# Altium PCB audioVersterkerPCB.PcbDoc
Units mil, origin at the board's own origin, x right, y up, seen from the top; angles counter-clockwise.
Board outline 6000 x 4000 mil, 2 copper layers (Top Layer, Bottom Layer); 63 components, 33 nets, 144 pads, 3 vias.
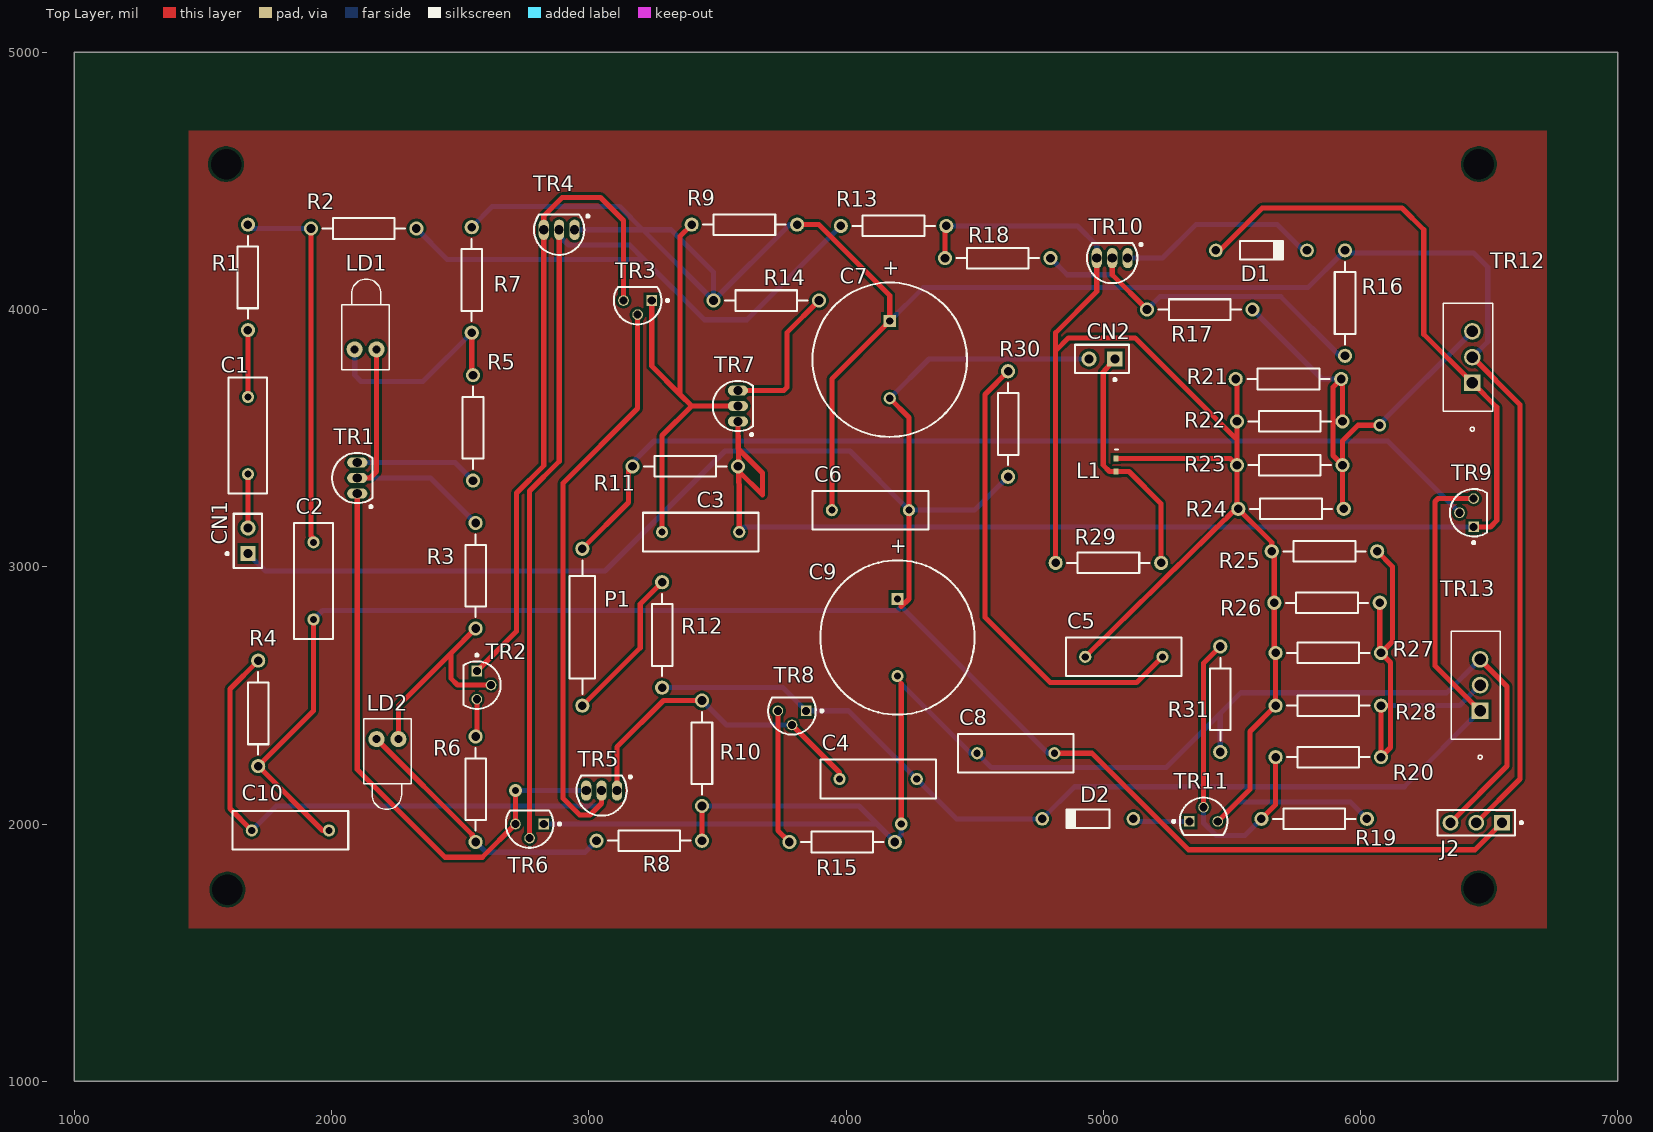
[diagram p0: Top Layer view]
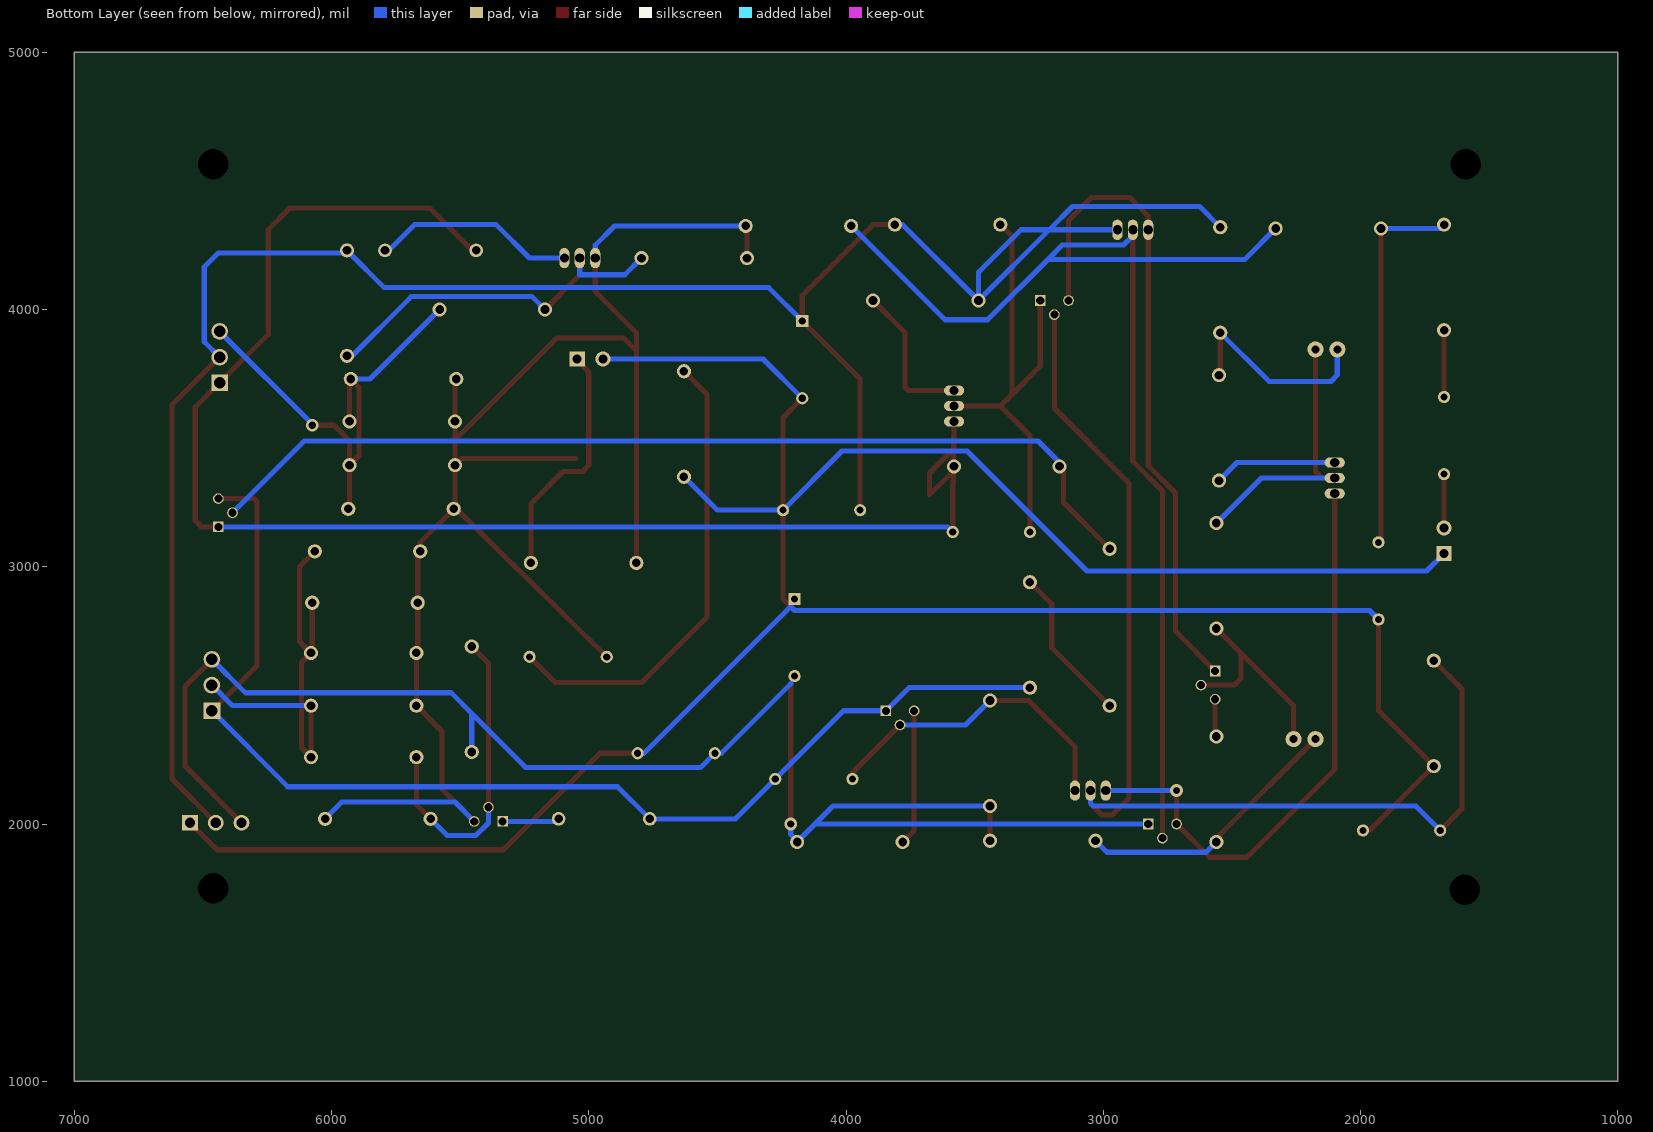
[diagram p1: Bottom Layer view, seen from below]

## Layer stack, top to bottom
Top Solder: solder mask 0.4, Solder Resist, Dk 3.5
Top Layer: signal copper 1.4
Dielectric 1: dielectric 12.6, FR-4, Dk 4.8
Bottom Layer: signal copper 1.4
Bottom Solder: solder mask 0.4, Solder Resist, Dk 3.5

## Board outline
1000,1000 7000,1000 7000,5000 1000,5000

## Design rules (kind name [scope] priority, off if disabled: settings)
Clearance [All] p1: gap=10 ignorepadtopadclearanceinfootprint=FALSE except(0: Arc-Hole Track-Hole SMDPad-Hole THPad-Hole Via-Hole Fill-Hole Poly-Hole Region-Hole Text-Hole)
HoleSize [All] p1: absolutevalues=TRUE maxlimit=137.8 minlimit=1 maxpercent=80.000 minpercent=20.000
PolygonConnect [All] p1: connectstyle=Relief reliefconductorwidth=10 reliefentries=4 polygonreliefangle="90 Angle" airgapwidth=10
RoutingVias [All] p1: holewidth=28 width=50 viastyle="Through Hole" minholewidth=28 minwidth=50 maxholewidth=28 maxwidth=50
SolderMaskExpansion [All] p1: expansion=4 istentingtop=FALSE
Width [All] p1: maxlimit=20 minlimit=20 preferedwidth=20 minimp=50.000000 maximp=50.000000 favimp=50.000000
29 further rules are at their usual default settings.

## Components (designator, comment, footprint, x,y, rotation, side; value= is the part's Value field where it differs from the comment)
C1 "Cap" RAD-0.3 1675,3510 r90 top value=100pF
C2 "Cap" RAD-0.3 1930,2945 r270 top value=100pF
C3 "Cap" RAD-0.3 3435,3135 r0 top value=100pF
C4 "Cap" RAD-0.3 4125,2175 r180 top value=100pF
C5 "Cap" RAD-0.3 5080,2650 r0 top value=100pF
C6 "Cap" RAD-0.3 4095,3220 r0 top value=100pF
C7 "Cap Pol1" RB7.6-15 4170,3805 r90 top value=100pF
C8 "Cap" RAD-0.3 4660,2275 r180 top value=100pF
C9 "Cap Pol1" RB7.6-15 4200,2725 r90 top value=100pF
C10 "Cap" RAD-0.3 1840,1975 r0 top value=100pF
CN1 "MHDR1X2" PIN2 1675,3051 r90 top
CN2 "MHDR1X2" PIN2 5045,3808 r180 top
D1 "1N4148" NXP-SOD27-2_V 5615,4230 r0 top
D2 "1N4148" NXP-SOD27-2_V 4940,2020 r180 top
J2 "22-28-4033" MOLX-22-28-4033_V 6450,2005 r180 top
L1 "Inductor" 0402-A 5050,3395.32 r270 top value=10mH
LD1 "LED1" LED-1 2135,3845 r90 top
LD2 "LED1" LED-1 2215,2330 r270 top
P1 "Res Adj2" AXIAL-0.6 2975,2765 r90 top value=1K
R1 "Res2" AXIAL-0.4 1675,4125 r90 top value=1K
R2 "Res2" AXIAL-0.4 2125,4315 r0 top value=1K
R3 "Res2" AXIAL-0.4 2560,2965 r90 top value=1K
R4 "Res2" AXIAL-0.4 1715,2430 r90 top value=1K
R5 "Res2" AXIAL-0.4 2550,3540 r90 top value=1K
R6 "Res2" AXIAL-0.4 2560,2135 r90 top value=1K
R7 "Res2" AXIAL-0.4 2545,4115 r90 top value=1K
R8 "Res2" AXIAL-0.4 3235,1935 r0 top value=1K
R9 "Res2" AXIAL-0.4 3605,4330 r0 top value=1K
R10 "Res2" AXIAL-0.4 3440,2275 r90 top value=1K
R11 "Res2" AXIAL-0.4 3375,3390 r0 top value=1K
R12 "Res2" AXIAL-0.4 3285,2735 r90 top value=1K
R13 "Res2" AXIAL-0.4 4185,4325 r0 top value=1K
R14 "Res2" AXIAL-0.4 3690,4035 r180 top value=1K
R15 "Res2" AXIAL-0.4 3985,1930 r180 top value=1K
R16 "Res2" AXIAL-0.4 5940,4025 r90 top value=1K
R17 "Res2" AXIAL-0.4 5375,4000 r0 top value=1K
R18 "Res2" AXIAL-0.4 4590,4200 r0 top value=1K
R19 "Res2" AXIAL-0.4 5820,2020 r0 top value=1K
R20 "Res2" AXIAL-0.4 5875,2260 r0 top value=1K
R21 "Res2" AXIAL-0.4 5720,3730 r0 top value=1K
R22 "Res2" AXIAL-0.4 5725,3565 r0 top value=1K
R23 "Res2" AXIAL-0.4 5725,3395 r0 top value=1K
R24 "Res2" AXIAL-0.4 5730,3225 r0 top value=1K
R25 "Res2" AXIAL-0.4 5860,3060 r180 top value=1K
R26 "Res2" AXIAL-0.4 5870,2860 r180 top value=1K
R27 "Res2" AXIAL-0.4 5875,2665 r180 top value=1K
R28 "Res2" AXIAL-0.4 5875,2460 r180 top value=1K
R29 "Res2" AXIAL-0.4 5020,3015 r0 top value=1K
R30 "Res2" AXIAL-0.4 4630,3555 r90 top value=1K
R31 "Res2" AXIAL-0.4 5455,2485 r90 top value=1K
TR1 "BC560CG" TO-92A 2100,3345 r0 top
TR2 "BC550CG" ONSC-TO-92-3-29-11 2565,2540 r270 top
TR3 "BC550CG" ONSC-TO-92-3-29-11 3190,4035 r180 top
TR4 "BC550CG" TO-92A 2885,4310 r90 top
TR5 "BC560CG" TO-92A 3050,2130 r90 top
TR6 "BC560CG" ONSC-TO-92-3-29-11 2770,2000 r180 top
TR7 "BC560CG" TO-92A 3580,3625 r0 top
TR8 "BC550CG" ONSC-TO-92-3-29-11 3790,2440 r180 top
TR9 "BC550CG" ONSC-TO-92-3-29-11 6440,3210 r90 top
TR10 "BC550CG" TO-92A 5035,4200 r90 top
TR11 "BC560CG" ONSC-TO-92-3-29-11 5390,2010 r0 top
TR12 "BDW93C" BDW93C 2840,17160 r90 top
TR13 "BDW94C" BDW94C 4860,9480 r90 top

## Footprints (in the part's own frame and the unit in brackets; to place one, negate y for a bottom-side part, rotate by r counter-clockwise, add the part's x,y. Pads: shape width x height; smd on the part's side, far side on the other; paste and mask are expansions set on the pad)
0402-A [mm] "Chip Inductor, Body 1.0x0.5mm, IPC High Density"
  rect 0.6x0.5 smd: 1(-0.635,0) 2(0.635,0)
  silkscreen extent -1.52,-0.13 -1.52,0.17, body extent -0.55,-0.3 0.55,0.3, height 0.55
AXIAL-0.4 [mm] "Axial Device, Thru-Hole; 2 Leads; 0.4 in Pin Spacing"
  round 1.4 hole 0.85: 1(-5.207,0) 2(5.207,0)
  silkscreen extent -4.06,-1.02 4.06,1.02
AXIAL-0.6 [mm] "Axial Device, Thru-Hole; 2 Leads; 0.6 in Pin Spacing"
  round 1.4 hole 0.85: 1(-7.747,0) 2(7.747,0)
  silkscreen extent -6.6,-1.27 6.6,1.27
BDW93C [mil]
  rect 65x65 hole 45: 1(-13445,-3595)
  round 65 hole 45: 2(-13345,-3595) 3(-13245,-3595)
  silkscreen extent -13633,-3674 -13135,-3483, body extent -13445,-3595 -13435,-3585, height 10
BDW94C [mil]
  rect 65x65 hole 45: 1(-7040,-1605)
  round 65 hole 45: 2(-6940,-1605) 3(-6840,-1605)
  silkscreen extent -7228,-1684 -6730,-1493, body extent -7040,-1605 -7030,-1595, height 10
LED-1 [mm] "LED; 2 Leads"
  round 1.6 hole 0.8: 1(0,1.143) 2(0,-1.016)
  silkscreen extent -2,-2.29 6.95,2.41
MOLX-22-28-4033_V [mm] "THD, 3-Leads, Body 7.62x2.49mm, Pitch 2.54mm"
  rect 1.55x1.55 hole 1.02: 1(-2.54,0)
  round 1.55 hole 1.02: 2(0,0) 3(2.54,0)
  silkscreen extent -4.59,-1.25 3.81,1.25, body extent -3.81,-1.24 3.81,1.24, height 8.38
NXP-SOD27-2_V [mm] "SOD27, 2-Leads, Dia 1.85mm, Body Length 4.25mm, Pin Spacing 9mm"
  round 1.35 hole 0.85: 1(-4.5,0) 2(4.5,0)
  silkscreen extent -2.13,-0.93 2.13,0.93, body extent -4.78,-0.92 4.78,0.92, height 1.84
ONSC-TO-92-3-29-11 [mm] "TO, 3-Leads, Body Dia 4.7mm, Pitch 1.27mm"
  rect 1.05x1.05 hole 0.8: 1(-1.397,0)
  round 1.05 hole 0.8: 2(0,1.397) 3(1.397,0)
  silkscreen extent -3.07,-1.34 2.35,2.35, body extent -2.35,-1.33 2.36,2.36, height 7.87
PIN2 [mm] "Photosensitive Diode; 2 Leads"
  rect 1.5x1.5 hole 0.9: 1(0,0)
  round 1.5 hole 0.9: 2(2.54,0)
  silkscreen extent -1.4,-1.4 3.94,2.17
RAD-0.3 [mm] "Radial Cap, Thru-Hole; 2 Leads; 0.3 in Pin Spacing"
  round 1.2 hole 0.7: 1(-3.81,0) 2(3.81,0)
  silkscreen extent -5.71,-1.91 5.71,1.91
RB7.6-15 [mm] "Polarized Capacitor (Radial); 2 Leads"
  rect 1.2x1.2 hole 0.7: 1(3.81,0)
  round 1.2 hole 0.7: 2(-3.81,0)
  silkscreen extent -7.62,-7.62 7.62,7.62
TO-92A [mm] "TO, Flat Index; 3 In-Line, Axial Leads; Body Dia. 4.5mm; Leads 0.51 x 0.48 mm (max)"
  oval 2x1 hole 0.9: 1(0,-1.524) 2(0,0) 3(0,1.524)
  silkscreen extent -2.48,-2.95 1.5,2.48, body extent -2.48,-2.5 1.5,2.5, height 6.86

## Part data
C1 C2 C3 C4 C5 C6 C8 C10: "Capacitor", LatestRevisionDate=17-Jul-2002, LatestRevisionNote="Re-released for DXP Platform.", PackageDescription="Radial Cap, Thru-Hole; 2 Leads; 0.3 in Pin Spacing", PackageReference=RAD-0.3, Published=8-Jun-2000, Publisher="Altium Limited"
C7 C9: "Polarized Capacitor (Radial)", LatestRevisionDate=17-Jul-2002, LatestRevisionNote="Re-released for DXP Platform.", PackageDescription="Polarized Capacitor (Radial); 2 Leads", PackageReference=RB7.6-15, Published=8-Jun-2000, Publisher="Altium Limited"
CN1 CN2: "Header, 2-Pin", LatestRevisionDate=17-Jul-2002, LatestRevisionNote="Re-released for DXP Platform.", Publisher="Altium Limited"
D1 D2: library part CMP-0648-00002-1, "High-speed Diode, 100 V, 450 mA, 2-Pin SOD27, RoHS", Manufacturer="NXP Semiconductors", Cd="4 pF Max.", ComponentLink1Description="Manufacturer URL", ComponentLink1URL=http://www.nxp.com/, ComponentLink2Description=Datasheet, ComponentLink2URL=http://www.nxp.com/documents/data_sheet/1N4148_1N4448.pdf, ComponentLink3Description="Package Specification", ComponentLink3URL=http://www.nxp.com/documents/data_sheet/1N4148_1N4448.pdf, Configuration=Single, DatasheetVersion=Aug-04, IF="200 mA Max.", IFRM="450 mA", IFSM="4 A Max.", IR (VR="20 V)=25 nA", Mounting Technology="Through Hole", PackageDescription="2-Pin Hermetically Sealed Glass Package, Axial Leaded, Dia 1.85 mm, Body Length 4.25 mm, Lead Spread 25.4 mm", PackageReference=SOD27, PackageVersion=Aug-04, PartNumber=1N4148, RoHS=TRUE, Trr="4 ns Max.", VF (IF="10 mA)=1 V", VR="100 V Max."
J2: library part CMP-1676-00001-5, "Male Header, Pitch 2.54 mm, 1 x 3 Position, Height 8.38 mm, Tail Length 3.18 mm, RoHS, Bulk", Colour=Black, Current Rating="4 A", Manufacturer=Molex, Max Operating Temperature="75 degC", Min Operating Temperature="0 degC", Package Quantity=1, Voltage Rating="250 V", ComponentLink1Description="Manufacturer URL", ComponentLink1URL=http://www.molex.com/, ComponentLink2Description=Datasheet, ComponentLink2URL=http://www.molex.com/pdm_docs/sd/022284033_sd.pdf, Contact Finish=Gold, Contact Material=Brass, Contact Plating=Gold, DatasheetVersion="Rev. G, 01/2012", Height="8.38 mm", Lead Pitch="0.1 inch", Length="7.62 mm", Mount="Through Hole", Mounting Technology="Through Hole", PackageDescription="Male Header, Pitch 2.54 mm, 1 x 3 Position, Height 8.38 mm, Tail Length 3.18 mm", PackageReference=22-28-4033, Packaging=Bulk, Pins=3, REACH SVHC=Unknown, RoHSCompliant=true, Rows=1
LD1 LD2: "Typical RED GaAs LED", LatestRevisionDate=08-Jul-2005, LatestRevisionNote="Mech Layer 1 removed.", PackageDescription="LED; 2 Leads", PackageReference=LED-1, Published=8-Jun-2000, Publisher="Altium Limited"
P1: "Variable Resistor", LatestRevisionDate=17-Jul-2002, LatestRevisionNote="Re-released for DXP Platform.", PackageDescription="Axial Device, Thru-Hole; 2 Leads; 0.6 in Pin Spacing", PackageReference=AXIAL-0.6, Published=8-Jun-2000, Publisher="Altium Limited", Set Position=0.5
R1 R2 R3 R4 R5 R6 R7 R8 R9 R10 R11 R12 R13 R14 R15 R16 R17 R18 R19 R20 R21 R22 R23 R24 R25 R26 R27 R28 R29 R30 R31: "Resistor", LatestRevisionDate=17-Jul-2002, LatestRevisionNote="Re-released for DXP Platform.", PackageDescription="Axial Device, Thru-Hole; 2 Leads; 0.4 in Pin Spacing", PackageReference=AXIAL-0.4, Published=8-Jun-2000, Publisher="Altium Limited"
TR1 TR5 TR7: library part CMP-1048-01446-1_1, "Low Noise Transistor, PNP Silicon, 3-Pin TO-92, Pb-Free, Bulk Box", Manufacturer="ON Semiconductor", ComponentLink1Description="Manufacturer URL", ComponentLink1URL=http://www.onsemi.com/, ComponentLink2Description=Datasheet, ComponentLink2URL=http://www.onsemi.com/pub_link/Collateral/BC560C-D.PDF, ComponentLink3Description="Package Specification", ComponentLink3URL=http://www.onsemi.cn/pub_link/Collateral/2N6426-D.PDF, DatasheetVersion="Rev. 4", IC Continuous (A)=-0.1, Manufacturer Part Number=BC560CG, Mounting Technology="Through Hole", PackageDescription="3-Pin Transistor Outline, Body 4.825 x 3.685 mm, Pitch 1.27 mm", PackageReference=TO-92-3-29-11_AM_SL, PackageVersion="Rev. AM", Packing="Bulk Box", PartNumber=BC560CG, Polarity=PNP, RoHS=TRUE
TR2 TR3 TR8 TR9: library part CMP-1048-01461-1, "Low Noise Transistor, NPN Silicon, 3-Pin TO-92, Pb-Free, Bulk Box", Manufacturer="On Semiconductor", ComponentLink1Description="Manufacturer URL", ComponentLink1URL=http://www.onsemi.com/, ComponentLink2Description=Datasheet, ComponentLink2URL=http://www.onsemi.com/pub_link/Collateral/BC550C-D.PDF, ComponentLink3Description="Package Specification", ComponentLink3URL=http://www.onsemi.cn/pub_link/Collateral/2N6426-D.PDF, DatasheetVersion="Rev. 2", IC Continuous (A)=0.1, Mounting Technology="Through Hole", PackageDescription="3-Pin Transistor Outline, Body 4.825 x 3.685 mm, Pitch 1.27 mm", PackageReference=TO-92-3-29-11_AM_SL, PackageVersion="Rev. AM", Packing="Bulk Box", PartNumber=BC550CG, Polarity=NPN, RoHS=TRUE
TR4 TR10: library part CMP-1048-01461-1_1, "Low Noise Transistor, NPN Silicon, 3-Pin TO-92, Pb-Free, Bulk Box", Manufacturer="ON Semiconductor", ComponentLink1Description="Manufacturer URL", ComponentLink1URL=http://www.onsemi.com/, ComponentLink2Description=Datasheet, ComponentLink2URL=http://www.onsemi.com/pub_link/Collateral/BC550C-D.PDF, ComponentLink3Description="Package Specification", ComponentLink3URL=http://www.onsemi.cn/pub_link/Collateral/2N6426-D.PDF, DatasheetVersion="Rev. 2", IC Continuous (A)=0.1, Manufacturer Part Number=BC550CG, Mounting Technology="Through Hole", PackageDescription="3-Pin Transistor Outline, Body 4.825 x 3.685 mm, Pitch 1.27 mm", PackageReference=TO-92-3-29-11_AM_SL, PackageVersion="Rev. AM", Packing="Bulk Box", PartNumber=BC550CG, Polarity=NPN, RoHS=TRUE
TR6 TR11: library part CMP-1048-01446-1, "Low Noise Transistor, PNP Silicon, 3-Pin TO-92, Pb-Free, Bulk Box", Manufacturer="On Semiconductor", ComponentLink1Description="Manufacturer URL", ComponentLink1URL=http://www.onsemi.com/, ComponentLink2Description=Datasheet, ComponentLink2URL=http://www.onsemi.com/pub_link/Collateral/BC560C-D.PDF, ComponentLink3Description="Package Specification", ComponentLink3URL=http://www.onsemi.cn/pub_link/Collateral/2N6426-D.PDF, DatasheetVersion="Rev. 4", IC Continuous (A)=-0.1, Mounting Technology="Through Hole", PackageDescription="3-Pin Transistor Outline, Body 4.825 x 3.685 mm, Pitch 1.27 mm", PackageReference=TO-92-3-29-11_AM_SL, PackageVersion="Rev. AM", Packing="Bulk Box", PartNumber=BC560CG, Polarity=PNP, RoHS=TRUE
TR12 TR13: "No Description Available", Built_By=EMA_UL_Team, Copyright="Copyright (C) 2018 Accelerated Designs. All rights reserved", RefDes=RefDes, SourceLibrary=Updates_to_database_2020-11-02, Type=DEV, Vendor=STMicroelectronics
  TR12: Manufacturer_Part_Number=BDW93C
  TR13: Manufacturer_Part_Number=BDW94C
L1: Code_IEC=1005, Code_JEITA=0402, LatestRevisionDate=29-May-2009, LatestRevisionNote="IPC-7351 Footprint Added.", PackageDescription="Chip Inductor", PackageReference=0402-A, Published=8-Jun-2000, Publisher="Altium Limited"

## Free pads (board coordinates)
  round 60 hole 118.11 unplated: 1(1590,4565) 1(1595,1745)
  round 60 hole 118.11: 2(6460,4565) 4(6460,1750)

## Via types
v1: diameter 50, hole 28, Top Layer to Bottom Layer, 3 vias

## Nets (pads, with @x,y where several pads share a name; then routed paths per layer and width w, separated by ;. In a path a pad name is that pad's centre, name@x,y a point inside that pad or via, vN(x,y) a via of type N, cw(c..) or ccw(c..) an arc to the next point about the centre after c; other vN are vias at no path point)
+24: C6.1 C7.1 J2.2 R7.2 R9.2 R14.2 R16.2 TR4.1 TR12.2 | length 8481.4
  Top Layer w20: R9.2 3895,4330 4170,4055 C7.1 3945,3730 C6.1 ; TR12.2 6620,3630 6620,2175 J2.2
  Bottom Layer w20: R7.2 2625,4400 3120,4400 3210,4310 ; TR4.1 3210,4310 ; R9.2 3780,4330 R14.2 ; C7.1 4300,4085 5795,4085 5930,4220 6440,4220 6495,4165 6495,3875 TR12.2 ; 3210,4310 3320,4310 3485,4145 R14.2 ; 3210,4310 R14.2
-24: C8.2 C9.2 J2.3 R8.2 R10.1 R15.1 R31.1 TR6.1 TR13.3 | length 6341.6
  Top Layer w20: R8.2 R10.1 ; v1(4215,2000) 4215,2545 ; J2.3 6570,2225 6570,2535 TR13.3
  Bottom Layer w20: TR6.1 4120,2000 ; R10.1 4050,2070 4120,2000 ; v1(4215,2000) 4215,1959.27 4190,1934.27 R15.1 4120,2000 ; 4215,2545 4485,2275 C8.2 4565,2220 5245,2220 5455,2430 ; R31.1 5455,2430 ; TR13.3 6335,2510 5535,2510 5455,2430
GND: C2.2 C6.2 C7.2 C8.1 C9.1 C10.2 CN1.1 CN2.2 J2.1 R4.1 R30.1 | length 11130.8
  Top Layer w20: C2.2 1930,2440 R4.1 1965,1975 C10.2 ; C7.2 4245,3580 C6.2 4245,2875 4215,2845 ; C8.1 4956,2275 5331,1900 6445,1900 J2.1
  Bottom Layer w20: CN1.1 1743,2983 3063,2983 3530,3450 4015,3450 C6.2 4500,3220 R30.1 ; C2.2 1965,2830 4200,2830 4215,2845 4785,2275 C8.1 ; C7.2 4323,3808 CN2.2
NetC1_1: C1.1 CN1.2 | length 209
  Top Layer w20: CN1.2 C1.1
NetC1_2: C1.2 R1.1 | length 260
  Top Layer w20: C1.2 R1.1
NetC2_1: C2.1 R1.2 R2.1 | length 1475.4
  Top Layer w20: R2.1 1920,3120.34 1924.79,3115.55 1924.79,3100.21 C2.1
  Bottom Layer w20: R1.2 1690,4315 R2.1
NetC3_1: C3.1 R9.1 TR3.1 TR7.2 | length 1870.5
  Top Layer w20: TR3.1 3245,3780 3355,3670 ; C3.1 3285,3510 3400,3625 ; R9.1 3355,4285 3355,3670 ; TR7.2 3400,3625 ; 3355,3670 3400,3625
NetC3_2: C3.2 D1.1 R11.2 TR7.1 TR9.1 TR12.1 | length 6039.2
  Top Layer w20: R11.2@3565,3390 R11.2@3583.33,3371.67 ; C3.2 3585,3275 R11.2@3583.33,3371.67 ; D1.1@5437.83,4215 5617.83,4395 6161,4395 6246,4310 6246,3904 TR12.1 6530,3620 6530,3180 6505,3155 TR9.1 ; 3581.84,3458.16 3675,3365 3675,3280 R11.2@3583.33,3371.67 ; 3581.84,3458.16 3580,3460 TR7.1 3581.84,3458.16 ; 3581.84,3458.16 3583.01,3390.31 R11.2@3583.33,3371.67
  Bottom Layer w20: C3.2 3605,3155 TR9.1
NetC4_1: C4.1 D2.2 R12.1 TR8.1 TR9.3 TR13.1 | length 4605.8
  Top Layer w20: TR9.3 6301.72,3265 6290,3253.28 6290,2615 TR13.1
  Bottom Layer w20: R12.1 3755,2530 TR8.1 4010,2440 C4.1 4430,2020 D2.2 4887.83,2145 6170,2145 TR13.1
NetC4_2: C4.2 R10.2 TR5.1 TR8.2 | length 1250.5
  Top Layer w20: TR5.1 3110,2300 3290,2480 R10.2 ; TR8.2 3975,2200 C4.2
  Bottom Layer w20: R10.2 3535,2385 TR8.2
NetC5_1: C5.1 L1.1 R13.2 R18.1 R19.2 R21.1 R22.1 R23.1 R24.1 R25.2 R26.2 R27.2 R28.2 R29.1 TR10.3 TR11.3 | length 6757.4
  Top Layer w20: R18.1 4385,4320 R13.2 ; R29.1 4815,3840 ; C5.1 R24.1@5520,3230 ; TR10.3 4975,4070 4815,3910 4815,3840 ; L1.1 5494.68,3420.32 R23.1 ; TR11.3 5570,2135 5570,2360 R28.2 R27.2 5665,2670 R26.2 5665,3050 R25.2 5655,3095 R24.1 R24.1@5520,3230 ; R21.1 5520,3725 R22.1 5520,3494 ; 4815,3840 4865,3890 5124,3890 5520,3494 ; R24.1@5520,3230 R23.1 ; R23.1 5520,3494
  Bottom Layer w20: R13.2 4900,4325 4975,4250 TR10.3 ; TR11.3 5520,2085 5960,2085 R19.2
NetC5_2: C5.2 R30.2 | length 1829.9
  Top Layer w20: R30.2 4540,3670 4540,2804 4794,2550 5130,2550 C5.2
NetC10_1: C10.1 R4.2 TR3.2 TR5.2 | length 4439.4
  Top Layer w20: C10.1 1605,2060 1605,2525 R4.2 ; TR5.2 3050,2080 3005,2035 2965,2035 2900,2100 2900,3325 3190,3615 TR3.2
  Bottom Layer w20: C10.1 1785,2070 3039,2070 3050,2081 TR5.2
NetCN2_1: CN2.1 L1.2 R29.2 | length 947.3
  Top Layer w20: CN2.1 5035.31,3798.31 5000,3756.88 5000,3395 5024.68,3370.32 L1.2 5100,3370.32 5225,3245.32 R29.2
NetD1_2: D1.2 TR10.1 | length 798.6
  Bottom Layer w20: TR10.1 5230,4200 5360,4330 5677.17,4330 D1.2@5792.17,4215
NetD2_1: D2.1 TR11.1 | length 222
  Bottom Layer w20: D2.1 5127.17,2010 TR11.1
NetLD1_1: LD1.1 R5.2 R7.1 | length 811.1
  Top Layer w20: R7.1 2545,3750 R5.2
  Bottom Layer w20: LD1.1 2090,3745 2115,3720 2355,3720 R7.1
NetLD1_2: LD1.2 R3.2 TR1.2 | length 1092.8
  Top Layer w20: TR1.2 2150,3345 2175,3370 LD1.2
  Bottom Layer w20: TR1.2 2385,3345 R3.2
NetLD2_1: LD2.1 R3.1 TR2.2 | length 819.6
  Top Layer w20: LD2.1 2260,2460 2465,2665 ; R3.1 2465,2665 ; TR2.2 2490,2540 2465,2565 2465,2665
NetLD2_2: LD2.2 R6.1 R8.1 | length 1064.7
  Top Layer w20: LD2.2 2546.8,1958.2 2546.8,1952.7 2560,1939.5 R6.1
  Bottom Layer w20: R6.1 2600,1890 2985,1890 R8.1
NetP1_1: P1.1 R12.2 | length 608.4
  Top Layer w20: P1.1 3200,2685 3200,2855 R12.2
NetP1_2: P1.2 R11.1 TR9.2 | length 3781.1
  Top Layer w20: P1.2 3155,3250 R11.1@3155,3390
  Bottom Layer w20: R11.1@3155,3390 3254,3489 6106,3489 TR9.2
NetR2_2: R2.2 R13.1 TR4.2 TR6.2 | length 4752.3
  Top Layer w20: TR6.2 2770,3295 2885,3410 TR4.2
  Bottom Layer w20: R2.2 2450,4195 3215,4195 ; TR4.2 2885,4286.4 2920.77,4250.63 3159.37,4250.63 3215,4195 ; R13.1 3615,3960 3450,3960 3215,4195
NetR5_1: R5.1 TR1.3 | length 479
  Bottom Layer w20: TR1.3 2480,3405 R5.1
NetR6_2: R6.2 TR2.3 | length 147.1
  Top Layer w20: R6.2 2565,2345 TR2.3
NetR14_1: R14.1 TR7.3 | length 584.9
  Top Layer w20: TR7.3 3758.28,3685 3770,3696.72 3770,3910 R14.1
NetR15_2: R15.2 TR8.3 | length 528.6
  Top Layer w20: TR8.3 3735,1975 R15.2
NetR16_1: R16.1 R17.1 R18.2 TR10.2 | length 1468
  Top Layer w20: TR10.2 5035,4135 R17.1
  Bottom Layer w20: R18.2 4860,4135 5035,4135 TR10.2 ; R17.1 5220,4050 5690,4050 R16.1@5930,3810
NetR17_2: R17.2 R21.2 R22.2 R23.2 R24.2 TR12.3 | length 1935.6
  Top Layer w20: R22.2 5930,3725 R21.2 5893,3698 5893,3432 R23.2 ; R24.2 5930,3230 R23.2 ; v1@6074.26,3554.26 6070,3550 5990,3550 5930,3490 R23.2
  Bottom Layer w20: R17.2 5850,3730 R21.2 ; v1@6074.26,3554.26 TR12.3
  other v1: 6075,3550
NetR19_1: R19.1 R20.1 R31.2 TR11.2 | length 1247.9
  Top Layer w20: TR11.2 5390,2625 R31.2 ; R19.1 5670,2075 R20.1
  Bottom Layer w20: TR11.2 5390,2004 5439,1955 5550,1955 R19.1
NetR20_2: R20.2 R25.1 R26.1 R27.1 R28.1 TR13.2 | length 1689.4
  Top Layer w20: R25.1 6125,3000 6125,2710 R27.1 ; R26.1 6075,2670 R27.1 ; R28.1 R20.2 6117,2297 6117,2628 R27.1
  Bottom Layer w20: R28.1 6385,2460 TR13.2
NetTR1_1: TR1.1 TR5.3 TR6.3 | length 2287.7
  Top Layer w20: TR1.1 2100,2212 2441,1871 2586,1871 TR6.3 v1(2715,2130)
  Bottom Layer w20: v1(2715,2130) TR5.3
NetTR2_1: TR2.1 TR3.3 TR4.3 | length 2563.6
  Top Layer w20: TR2.1 2719,2749 2719,3287 2825,3393 TR4.3 2825,4363.28 2896.72,4435 3046,4435 3135,4346 TR3.3

## Polygon pours and split planes (outlines as drawn)
no net on Top Layer "NONET_L01_P000" (solid, pour order 0): 1445,4695 6725,4695 6725,1595 1445,1595

## Silkscreen, mask and mechanical layers (free items; w line width, h text height)
board outline:
  lines w10: 1445,1595 1445,4695 6725,4695 6725,1595 1445,1595

## Text inside footprints (layer, text, board x,y; h text height)
C7: Top Overlay "+" at 4199.01,4125.15 h59.06 r90
C9: Top Overlay "+" at 4229.01,3045.15 h59.06 r90